# EAGLE board PCB-for-IoT-brd (EAGLE 9.7.0)
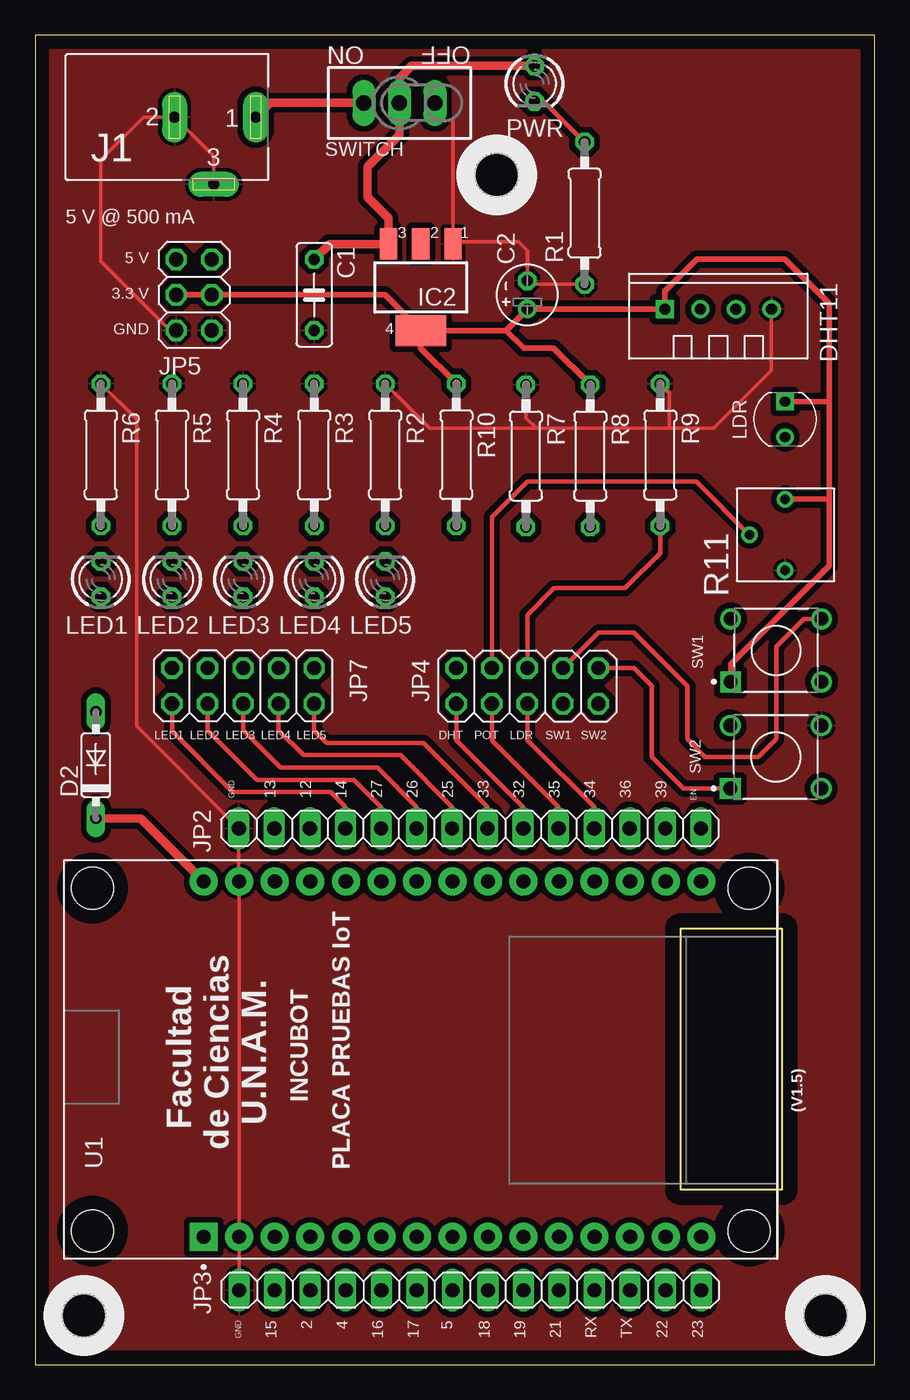
[diagram p0: board, top side]
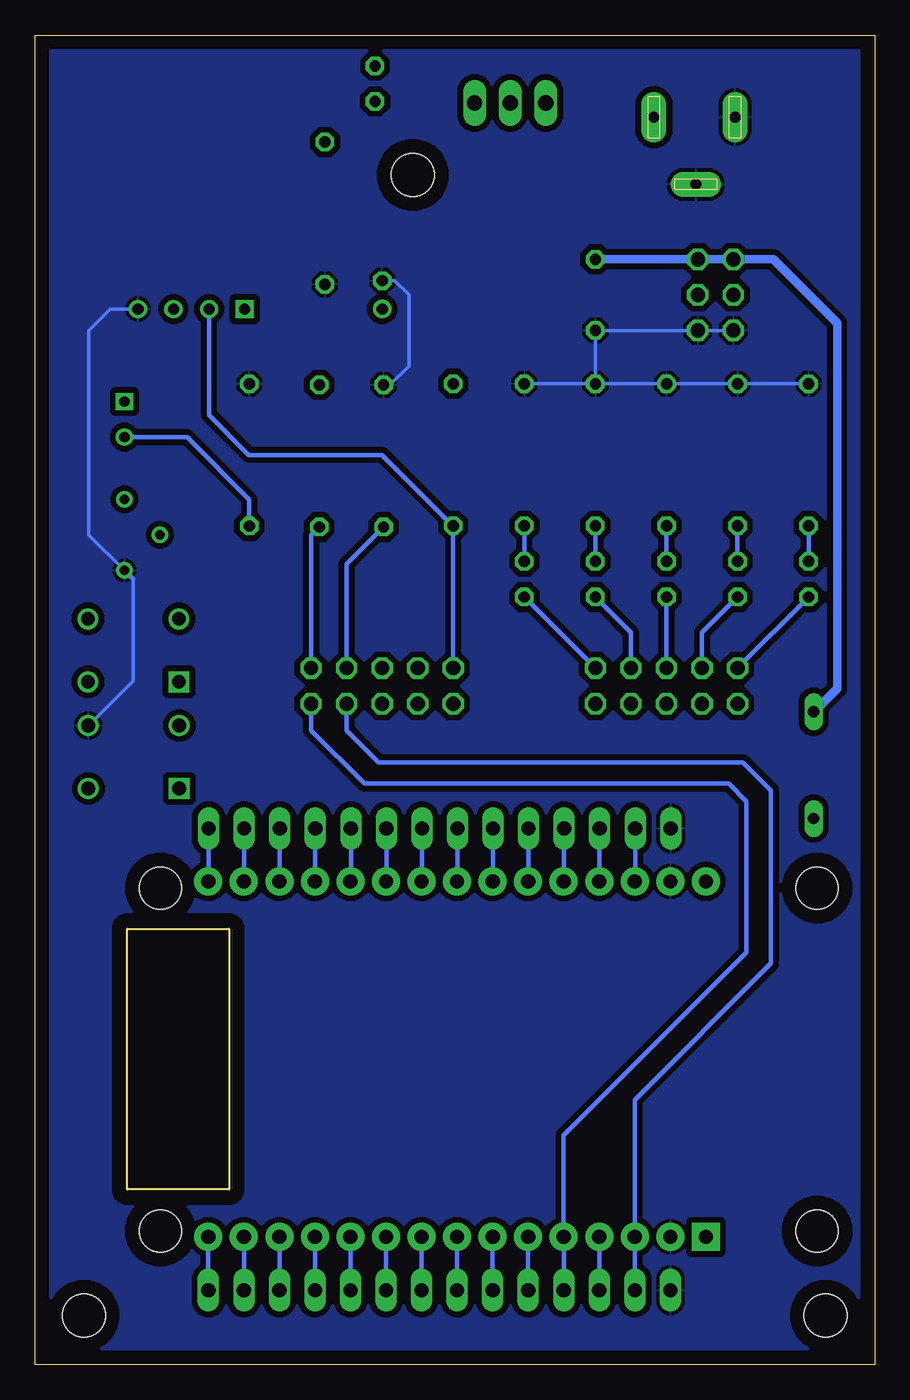
[diagram p1: board, bottom side, seen from below]

Size 60 x 95 mm. Coordinates in mm from the lower left corner, seen from the top.
Outline: 0,0 60,0 60,95 0,95 0,0
Outline: 53.41,12.51 53.41,31.14 46.13,31.14 46.13,12.51 53.41,12.51
Copper layers (1*16): Top / Bottom
Stack-up Default Layer Stack: Top User Defined 0.035mm / Dielectric-1 User Defined 1.5mm / Bottom User Defined 0.035mm
Design rules: minimum copper width 10mil, minimum drill size 0.35mm, copper clearance wire_polygon to wire_polygon 12mil, copper clearance wire_polygon to pad_smd 12mil, copper clearance wire_polygon to via 12mil, copper clearance pad_smd to pad_smd 12mil, copper clearance pad_smd to via 12mil, copper clearance via to via 12mil, copper clearance smd to pad (same net) 12mil, copper clearance smd to via (same net) 12mil, copper clearance smd to smd (same net) 12mil, dimension clearance 40mil, via restrict clearance 0mil, restrict clearance 0mil, drill distance 16mil, keepout clearance 0mil
Holes 3.1 mm at 33,85 3.5,3.5 56.5,3.5

## Footprints (pad centres in the part's own frame; a part is rotated, then mirrored left to right if it is on the bottom)
C050-025X075 = drill 0.813 octagon: 1 -2.54,0; 2 2.54,0
E2-4 = drill 0.813 pad 1.27: + -1.016,0 | drill 0.813 pad 1.27 octagon: - 1.016,0
DO35-7 = drill 0.813 long: A 3.81,0; C -3.81,0
TEMP-HUM-SENSOR-DHT11 = drill 0.8 square: 1 -3.81,0 | drill 0.8: 2 -1.27,0; 3 1.27,0; 4 3.81,0
SOT223 = smd 1.219 x 2.235: 1 -2.311,-3.099; 2 0,-3.099; 3 2.311,-3.099 | smd 3.6 x 2.2: 4 0,3.099
694106301002 = drill 0.8 pad 1.8 long: 1 13.6,0; 2 7.8,0; 3 10.6,-4.8
1X14 = drill 1.016 long: 1 -16.51,0; 2 -13.97,0; 3 -11.43,0; 4 -8.89,0; 5 -6.35,0; 6 -3.81,0; 7 -1.27,0; 8 1.27,0; 9 3.81,0; 10 6.35,0; 11 8.89,0; 12 11.43,0; 13 13.97,0; 14 16.51,0
2X05 = drill 1.016 octagon: 1 -5.08,-1.27; 2 -5.08,1.27; 3 -2.54,-1.27; 4 -2.54,1.27; 5 0,-1.27; 6 0,1.27; 7 2.54,-1.27; 8 2.54,1.27; 9 5.08,-1.27; 10 5.08,1.27
2X03 = drill 1.016 octagon: 1 -2.54,-1.27; 2 -2.54,1.27; 3 0,-1.27; 4 0,1.27; 5 2.54,-1.27; 6 2.54,1.27
NSL_PT_TO-18_PLASTIC = drill 0.725 square: 1 0,0 | drill 0.725: 2 2.54,0
LED3MM = drill 0.813 octagon: A -1.27,0; K 1.27,0
0207/10 = drill 0.813 octagon: 1 -5.08,0; 2 5.08,0
3362P-1-103LF = drill 0.66: 1 -2.54,0; 2 0,2.54; 3 2.54,0
1825910-6 = drill 0.99 square: 1 3.25,2.25 | drill 0.99: 2 3.25,-2.25; 3 -3.25,2.25; 4 -3.25,-2.25
TL3XPO = drill 1.1 pad 1.422 long: 1 -2.54,0; 2 0,0; 3 2.54,0
MODULE_ESP32_DEVKIT_V1 = drill 1.02 pad 2 square: 1 -12.7,15.515 | drill 1.02 pad 2: 2 -12.7,12.975; 3 -12.7,10.435; 4 -12.7,7.895; 5 -12.7,5.355; 6 -12.7,2.815; 7 -12.7,0.275; 8 -12.7,-2.265; 9 -12.7,-4.805; 10 -12.7,-7.345; 11 -12.7,-9.885; 12 -12.7,-12.425; 13 -12.7,-14.965; 14 -12.7,-17.505; 15 -12.7,-20.045; 16 12.7,-20.045; 17 12.7,-17.505; 18 12.7,-14.965; 19 12.7,-12.425; 20 12.7,-9.885; 21 12.7,-7.345; 22 12.7,-4.805; 23 12.7,-2.265; 24 12.7,0.275; 25 12.7,2.815; 26 12.7,5.355; 27 12.7,7.895; 28 12.7,10.435; 29 12.7,12.975; 30 12.7,15.515 | hole 3: -12.28,-23.475; 12.23,-23.475; 12.23,23.475; -12.28,23.475

## Placement (x,y rotation side)
C1  100 nF  [C050-025X075]  19.95,76.43 270 top
C2  10 uF  [E2-4]  35.19,76.43 90 top
D2  1N4148DO35-7  [DO35-7]  4.35,42.83 90 top
DHT11  DHT11  [TEMP-HUM-SENSOR-DHT11]  48.83,75.41 0 top
IC2  317EMP  [SOT223]  27.57,76.96 180 top
J1  694106301002  [694106301002]  2.17,89.13 0 top
JP2  PINHD-1X14  [1X14]  31.08,38.3 0 top
JP3  PINHD-1X14  [1X14]  31.1,5.31 0 top
JP4  PINHD-2X5  [2X05]  35.19,48.49 0 top
JP5  PINHD-2X3  [2X03]  11.36,76.43 270 top
JP7  PINHD-2X5  [2X05]  14.87,48.49 180 top
LDR  LDR  [NSL_PT_TO-18_PLASTIC]  53.6,68.81 270 top
LED1  [LED3MM]  4.71,56.11 90 top
LED2  [LED3MM]  9.79,56.11 90 top
LED3  [LED3MM]  14.87,56.11 90 top
LED4  [LED3MM]  19.95,56.11 90 top
LED5  [LED3MM]  25.03,56.11 90 top
PWR  [LED3MM]  35.7,91.52 270 top
R1  330  [0207/10]  39.28,82.27 90 top
R2  150  [0207/10]  25.03,65 270 top
R3  150  [0207/10]  19.95,65 270 top
R4  150  [0207/10]  14.87,65 270 top
R5  150  [0207/10]  9.79,65 270 top
R6  150  [0207/10]  4.71,65 270 top
R7  10k  [0207/10]  35.09,64.92 270 top
R8  10k  [0207/10]  39.69,64.92 270 top
R9  10k  [0207/10]  44.69,64.99 270 top
R10  5k  [0207/10]  30.11,65 90 top
R11  10k  [3362P-1-103LF]  53.6,59.28 90 top
SW1  1825910-6  [1825910-6]  52.97,51.03 180 top
SW2  1825910-6  [1825910-6]  52.94,43.41 180 top
SWITCH  TL32PO  [TL3XPO]  26.05,90.15 180 top
U1  ESP32-DEVKIT-V1  [MODULE_ESP32_DEVKIT_V1]  27.57,21.82 90 top

## Library data of the parts
C1 C2 = rcl; SPICEPREFIX: C
D2 = diode
DHT11 = DHT11
IC2 = linear
J1 = DC Power Jacks; CREATED_BY: PCBLayout.com; DIGIKEY_PART_NUMBER: 732-5930-ND; MANUFACTURER: Wurth Electronics Inc.; MPN: 694106301002
JP2-JP5 JP7 = Connector; CATEGORY: CONNECTOR; SUB-CATEGORY: PIN-HEADER
LDR = Sensor; CATEGORY: Sensor; DESCRIPTION: PHOTOCELL; MPN: NSL-19M51; OPERATING_TEMP: -60°C to 75°C; PART_STATUS: Active; ROHS_COMPLIANT: Non-Compliant; SERIES: -; SUB-CATEGORY: Photocell
LED1-LED5 PWR = led
R1-R10 = rcl; SPICEPREFIX: R
R11 = Potentiometer_Trimmers; CREATED_PN: PCBLayout.com; DIGIKEY_PN: 3362P-103LF-ND; MANUFACTURER: Bourns Inc.; MPN: 3362P-1-103LF
SW1 SW2 = Switch; CREATED_BY: PCBLayout.com; DIGIKEY_PART_NUMBER: 450-1650-ND; MANUFACTURER: TE Connectivity ALCOSWITCH Switches; MPN: 1825910-6
SWITCH = switch
U1 = ESP32-DEVKIT-V1; MANUFACTURER: DOIT; MAXIMUM_PACKAGE_HEIGHT: 6.8 mm; PARTREV: N/A; STANDARD: Manufacturer Recommendations

## Nets
3.3V: C2.+ DHT11.1 IC2.4 JP5.3 JP5.4 LDR.1 R8.1 R10.2 R11.3 SW1.1
3V3: U1.1
+5V: C1.1 D2.A IC2.3 JP5.1 JP5.2 PWR.A SWITCH.2
B1: JP4.8 R7.2 SW1.4
B1_P: JP3.2 JP4.7 U1.3
B2: JP4.10 R8.2 SW2.1
B2_P: JP3.4 JP4.9 U1.5
D2: JP3.3 U1.4
D5: JP3.7 U1.8
D12: JP2.3 U1.27
D13: JP2.2 U1.28
D18: JP3.8 U1.9
D19: JP3.9 U1.10
D21: JP3.10 U1.11
D22: JP3.13 U1.14
D23: JP3.14 U1.15
DHT11: DHT11.2 JP4.2 R10.1
DHT11_P: JP2.9 JP4.1 U1.21
EN: JP2.14 U1.16
GND: C1.2 C2.- DHT11.4 IC2.1 J1.2 J1.3 JP2.1 JP3.1 JP5.5 JP5.6 R1.1 R2.1 R3.1 R4.1 R5.1 R6.1 R7.1 R9.1 R11.1 SW2.4 U1.2 U1.29
LDR: JP4.6 LDR.2 R9.2
LDR_P: JP2.11 JP4.5 U1.19
LED1: JP2.4 JP7.10 U1.26
LED2: JP2.5 JP7.8 U1.25
LED3: JP2.6 JP7.6 U1.24
LED4: JP2.7 JP7.4 U1.23
LED5: JP2.8 JP7.2 U1.22
N$1: PWR.K R1.2
N$2: LED5.K R2.2
N$3: LED4.K R3.2
N$4: LED3.K R4.2
N$5: LED2.K R5.2
N$6: LED1.K R6.2
N$7: JP7.5 LED3.A
N$8: JP7.3 LED4.A
N$9: JP7.7 LED2.A
N$10: JP7.1 LED5.A
N$11: JP7.9 LED1.A
N$12: D2.C U1.30
POT: JP4.4 R11.2
POT_P: JP2.10 JP4.3 U1.20
RX0: JP3.11 U1.12
RX2: JP3.5 U1.6
TX0: JP3.12 U1.13
TX2: JP3.6 U1.7
VCC: J1.1 SWITCH.3
VN: JP2.12 U1.18
VP: JP2.13 U1.17

## Tracks (layer width: path | path; a pad name or v marks a point on that pad's centre or on a via)
3.3V
  Top 0.305: IC2.4 28.19,73.24 28.19,73.88 28.2,73.89
  Top 0.406: JP5.3 JP5.4 25,76.43 IC2.4 27.57,72.62 R10.2 | 28.2,73.89 33.67,73.89 | 33.67,73.89 C2.+ DHT11.1 45.02,76.68 47.31,78.97 53.6,78.97 56.78,75.8 56.78,68.81 | 56.78,61.83 56.78,68.81 | R11.3 56.78,61.83 | 56.78,61.83 56.78,57.11 49.72,50.04 SW1.1 | R8.1 37.07,72.62 34.94,72.62 33.67,73.89 | LDR.1 56.78,68.81
+5V
  Top 0.61: C1.1 21.04,80.06 IC2.3 25.26,81.92 23.76,83.42 23.76,85.57 26.05,87.86 SWITCH.2 26.05,91.92 26.91,92.79 PWR.A
  Bottom 0.61: C1.1 JP5.2 JP5.1 7.25,78.97 2.68,74.4 2.68,48.31 D2.A
B1
  Top 0.305: JP4.8 40.27,52.3 42.81,52.3 46.62,48.49 46.62,44.68 47.89,43.41 51.7,43.41 52.97,44.68 52.97,51.31 54.95,53.28 SW1.4
  Bottom 0.305: JP4.8 37.73,57.2 R7.2
B1_P
  Bottom 0.305: JP3.2 U1.3 17.14,18.92 7.4,28.66 7.4,41.02 9.41,43.03 35.44,43.03 37.73,45.31 JP4.7
B2
  Top 0.305: JP4.10 42.81,49.76 44.08,48.49 44.08,43.41 46.33,41.16 SW2.1
  Bottom 0.305: JP4.10 40.27,59.26 R8.2
B2_P
  Bottom 0.305: JP4.9 40.27,45.31 36.46,41.51 10.43,41.51 9.15,40.23 9.15,29.44 22.21,16.38 U1.5 JP3.4
D2
  Bottom 0.305: U1.4 JP3.3
D5
  Bottom 0.305: U1.8 JP3.7
D12
  Bottom 0.305: JP2.3 19.64,34.55 U1.27
D13
  Bottom 0.305: JP2.2 17.11,34.55 U1.28
D18
  Bottom 0.305: U1.9 JP3.8
D19
  Bottom 0.305: U1.10 JP3.9
D21
  Bottom 0.305: U1.11 JP3.10
D22
  Bottom 0.305: U1.14 JP3.13
D23
  Bottom 0.305: U1.15 JP3.14
DHT11
  Bottom 0.305: JP4.2 R10.1 35.19,65 44.72,65 47.56,67.84 DHT11.2
DHT11_P
  Top 0.305: JP4.1 30.11,44.6 34.88,39.83 JP2.9
  Bottom 0.305: JP2.9 34.88,34.55 U1.21
EN
  Bottom 0.305: JP2.14 47.59,34.55 U1.16
GND
  Top 0.254: R6.1 7.25,67.54 7.25,45.62 JP2.1 14.56,34.55 | R2.1 28.2,66.91 35.83,66.91 | 35.83,66.91 45.35,66.91 | 45.35,66.91 48.52,66.91 52.64,71.02 DHT11.4 | 14.6,5.32 U1.2 U1.29 | 30.06,80.24 34.55,80.24 35.19,79.61 C2.- 35.44,77.19 R1.1 | R7.1 35.09,67.64 35.83,66.91 | 45.35,69.41 45.35,66.91 | JP5.5 9.66,73.89 4.71,78.84 4.71,86.08 7.76,89.13 J1.2 12.77,86.33 J1.3 | 29.88,88.85 IC2.1
  Top 0.305: IC2.1 30.06,80.24 | 14.6,5.32 JP3.1 | 14.56,34.55 U1.29 | R9.1 45.35,69.41
  Bottom 0.254: R6.1 R5.1 R4.1 R3.1 | R3.1 R2.1 | JP5.5 JP5.6 C1.2 R3.1 | 52.97,56.11 52.97,48.84 56.15,45.66 SW2.4 | R7.1 34.63,70 33.28,71.35 33.28,76.43 34.3,77.45 C2.- | R11.1 56.15,59.28 56.15,73.89 54.62,75.41 DHT11.4
  Bottom 0.305: R11.1 52.97,56.11
  pour Bottom (isolate 0.406): 0,0 59.98,0 59.98,94.94 0,94.94
  pour Top (isolate 0.406): 0,0 0,94.94 59.98,94.94 59.98,0
LDR
  Top 0.305: JP4.6 35.19,53.57 37.09,55.48 42.17,55.48 44.69,57.99 R9.2
  Bottom 0.305: R9.2 44.69,61.82 49.14,66.27 LDR.2
LDR_P
  Top 0.305: JP4.5 35.19,44.6 39.97,39.83 JP2.11
  Bottom 0.305: JP2.11 39.97,34.55 U1.19
LED1
  Top 0.305: JP7.10 9.79,45.26 14.13,40.92 21.11,40.92 22.18,39.85 JP2.4
  Bottom 0.305: JP2.4 22.18,34.55 U1.26
LED2
  Top 0.305: JP2.5 24.73,39.85 22.79,41.78 15.86,41.78 12.33,45.31 JP7.8
  Bottom 0.305: JP2.5 24.73,34.55 U1.25
LED3
  Top 0.305: JP7.6 14.87,45.34 17.56,42.65 24.47,42.65 27.27,39.85 JP2.6
  Bottom 0.305: JP2.6 27.27,34.55 U1.24
LED4
  Top 0.305: JP7.4 17.41,45.31 19.19,43.54 26.12,43.54 29.8,39.85 JP2.7
  Bottom 0.305: JP2.7 29.8,34.55 U1.23
LED5
  Top 0.305: JP7.2 19.95,45.31 20.84,44.43 27.77,44.43 32.34,39.85 JP2.8
  Bottom 0.305: JP2.8 32.34,34.55 U1.22
N$1
  Top 0.305: PWR.K 36.38,90.25 R1.2
N$2
  Bottom 0.305: LED5.K R2.2
N$3
  Bottom 0.305: LED4.K R3.2
N$4
  Bottom 0.305: LED3.K R4.2
N$5
  Bottom 0.305: LED2.K R5.2
N$6
  Bottom 0.305: R6.2 LED1.K
N$7
  Bottom 0.305: JP7.5 LED3.A
N$8
  Bottom 0.305: JP7.3 17.41,52.3 LED4.A
N$9
  Bottom 0.305: JP7.7 12.33,52.3 LED2.A
N$10
  Bottom 0.305: JP7.1 LED5.A
N$11
  Bottom 0.305: JP7.9 LED1.A
N$12
  Top 0.61: U1.30 7.56,39.02 D2.C
POT
  Top 0.305: JP4.4 32.65,60.55 35.19,63.09 47.26,63.09 R11.2
POT_P
  Top 0.305: JP4.3 32.65,44.6 37.42,39.83 JP2.10
  Bottom 0.305: JP2.10 37.42,34.55 U1.20
RX0
  Bottom 0.305: U1.12 JP3.11
RX2
  Bottom 0.305: U1.6 JP3.5
TX0
  Bottom 0.305: U1.13 JP3.12
TX2
  Bottom 0.305: U1.7 JP3.6
VCC
  Top 0.61: J1.1 16.79,90.15 SWITCH.3
VN
  Bottom 0.305: JP2.12 42.51,34.55 U1.18
VP
  Bottom 0.305: JP2.13 45.05,34.55 U1.17

## Text on the board
tNames: ON | OFF | 5 V @ 500 mA | 5 V | 3.3 V | GND | LED1 | LED2 | LED3 | LED4 | LED5 | DHT | POT | LDR | SW1 | SW2 | GND | 13 | 12 | 14 | 27 | 26 | 25 | 33 | 32 | 35 | 34 | 36 | 39 | EN | Facultad / de Ciencias / U.N.A.M. | INCUBOT | (V1.5) | PLACA PRUEBAS IoT | 2 | 4 | 5 | GND | 15 | 16 | 17 | 18 | 19 | 21 | RX | TX | 22 | 23